# EAGLE board Copy of ESP8266 Iot Button (3) (EAGLE 7.6.0)

Size 73.58 x 76.09 mm. Coordinates in mm from the lower left corner, seen from the top.
Outline: 0,0 56.82,0 56.82,53.33 0,53.33 0,0
Copper layers (1*16): Top 0.035mm / dielectric 1.5mm / Bottom 0.035mm
Design rules "default": minimum track width 10mil, minimum drill 24mil, track to track 8mil, track to pad 8mil, pad to pad 8mil, via to via 8mil, smd to smd 8mil, copper to edge 40mil, drill to drill 8mil, minimum pad ring 10mil, minimum via ring 8mil, stop-mask expansion 4mil, vias tented up to drill 0mil, thermal gap 10mil

## Footprints (pad centres in the part's own frame; a part is rotated, then mirrored left to right if it is on the bottom)
0207/10 = drill 0.813 octagon: 1 -5.08,0; 2 5.08,0
ARDUINO_UNO = drill 1.016 pad 1.88: 0 63.5,50.8; 1 60.96,50.8; 2 58.42,50.8; 3 55.88,50.8; 3.3V 35.56,2.54; 4 53.34,50.8; 5 50.8,50.8; 5V 38.1,2.54; 6 48.26,50.8; 7 45.72,50.8; 8 41.656,50.8; 9 39.116,50.8; 10 36.576,50.8; 11 34.036,50.8; 12 31.496,50.8; 13 28.956,50.8; A0 50.8,2.54; A1 53.34,2.54; A2 55.88,2.54; A3 58.42,2.54; A4 60.96,2.54; A5 63.5,2.54; AREF 23.876,50.8; GND 26.416,50.8; GND. 43.18,2.54; GND.. 40.64,2.54; I/OREF 30.48,2.54; N/C 27.94,2.54; RESET 33.02,2.54; SCL 18.796,50.8; SDA 21.336,50.8; VIN 45.72,2.54 | hole 3.2: 66.04,7.62; 66.04,35.56; 15.24,50.8; 13.97,2.54
2X4P-2.54-65/35MIL = drill 0.889 pad 1.651 square: 1 -1.27,3.81 | drill 0.889 pad 1.651: 2 -1.27,1.27; 3 -1.27,-1.27; 4 -1.27,-3.81; 5 1.27,-3.81; 6 1.27,-1.27; 7 1.27,1.27; 8 1.27,3.81

## Placement (x,y rotation side)
R1  10k‎Ω  [0207/10]  5,35.48 0 top
R2  10k‎Ω  [0207/10]  5,48.18 0 top
R3  5k‎Ω  [0207/10]  5,60.88 0 top
R4  5k‎Ω  [0207/10]  5,73.58 0 top
R5  5k‎Ω  [0207/10]  5,86.28 0 top  (outside the outline)
R6  1k‎Ω  [0207/10]  5,98.98 0 top  (outside the outline)
R7  1k‎Ω  [0207/10]  5,111.68 0 top  (outside the outline)
R8  10k‎Ω  [0207/10]  5,124.38 0 top  (outside the outline)
U1  [ARDUINO_UNO]  5,22.78 0 top
U3  [2X4P-2.54-65/35MIL]  5,10.08 0 top

## Library data of the parts
R1-R8 U1 U3 = AUTODESK_CIRCUITS_BREADBOARD

## Nets
N$1: R3.1 U1.1
N$2: R2.1 R3.2 U3.1
N$3: R5.1 U1.7
N$4: R1.1 R5.2 U3.7
N$5: R1.2 R2.2 R8.2 U1.GND. U3.4
N$6: R4.1 U1.8
N$7: R4.2 R8.1 U3.6
N$8: U1.0 U3.5
N$9: R7.1 U3.2
N$10: R6.1 U3.3
N$11: R6.2 R7.2 U1.3.3V U3.8

## Tracks (layer width: path | path; a pad name or v marks a point on that pad's centre or on a via)
N$1  (1 unrouted)
N$2  (2 unrouted)
N$3  (1 unrouted)
N$4  (2 unrouted)
N$5  (4 unrouted)
N$6  (1 unrouted)
N$7  (2 unrouted)
N$8  (1 unrouted)
N$9  (1 unrouted)
N$10  (1 unrouted)
N$11  (3 unrouted)